# Altium PCB SPD Breakout.PcbDoc
Units mil, origin at the board's own origin, x right, y up, seen from the top; angles counter-clockwise.
Board outline 1560 x 2845 mil, 2 copper layers (Top Layer, Bottom Layer); 2 components, 12 nets, 220 pads, 7 vias.
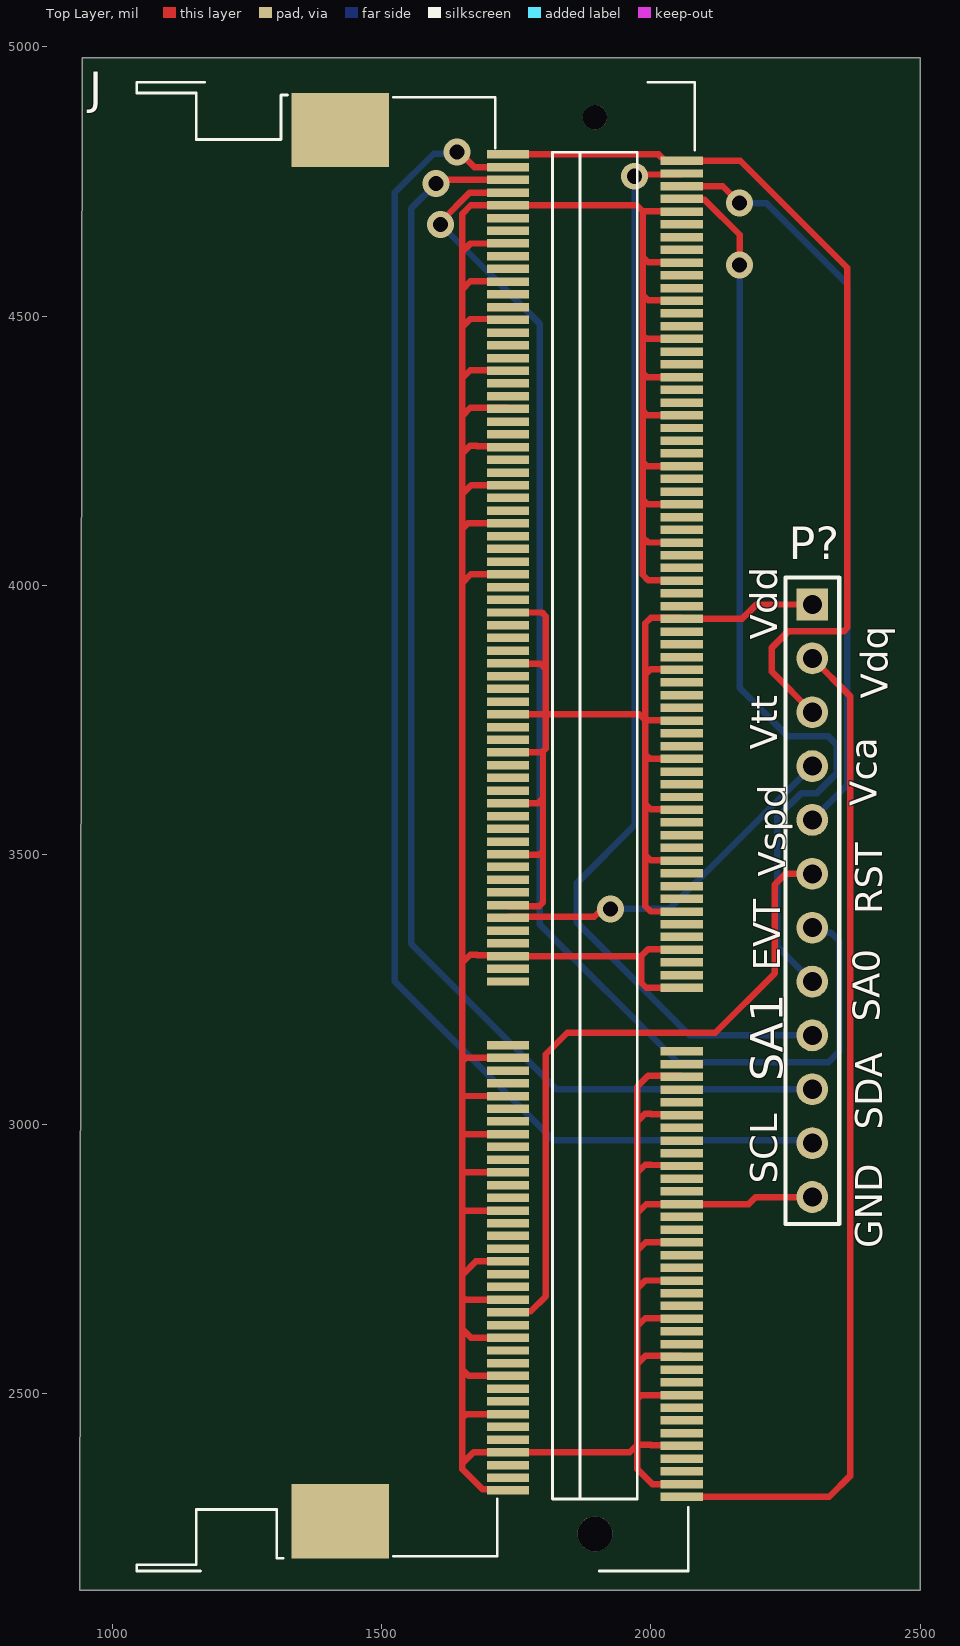
[diagram p0: Top Layer view]
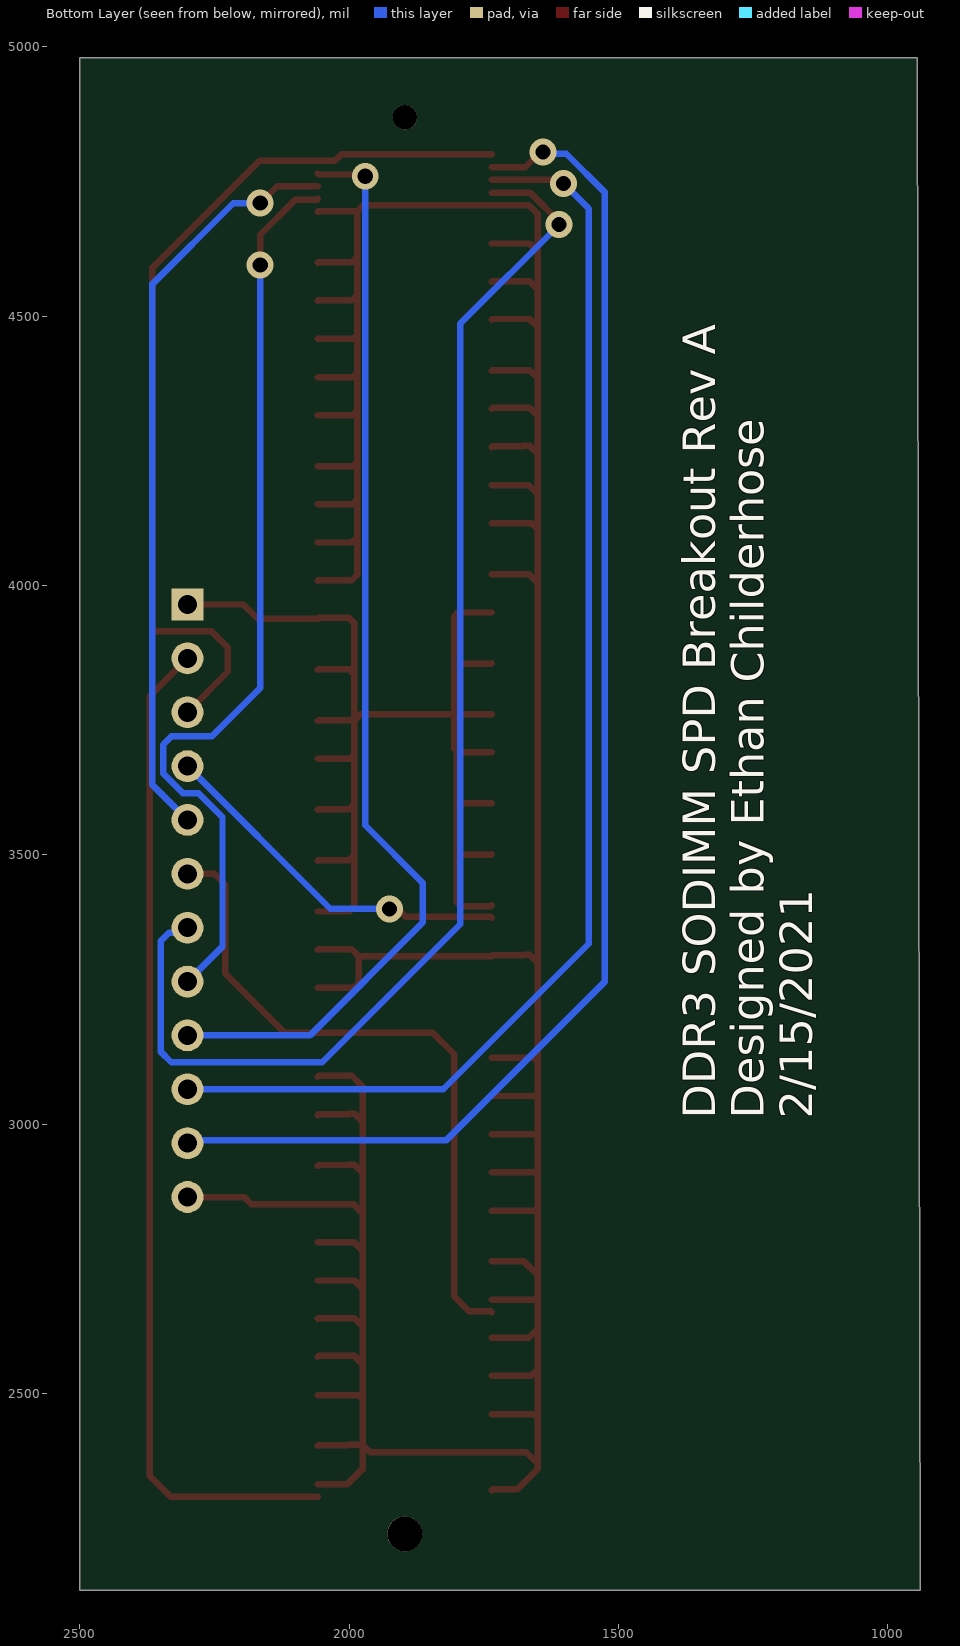
[diagram p1: Bottom Layer view, seen from below]

## Layer stack, top to bottom
Top Solder: solder mask 0.4, Solder Resist, Dk 3.5
Top Layer: signal copper 1.4
Dielectric 1: dielectric 12.6, FR-4, Dk 4.8
Bottom Layer: signal copper 1.4
Bottom Solder: solder mask 0.4, Solder Resist, Dk 3.5

## Board outline
945,4980 2500,4980 2500,2135 940,2135

## Design rules (kind name [scope] priority, off if disabled: settings)
Clearance [All] p1: gap=6 ignorepadtopadclearanceinfootprint=FALSE
PolygonConnect [All] p1: connectstyle=Relief reliefconductorwidth=10 reliefentries=4 polygonreliefangle="90 Angle" airgapwidth=10
RoutingVias [All] p1: holewidth=28 width=50 viastyle="Through Hole" minholewidth=28 minwidth=50 maxholewidth=28 maxwidth=50
SolderMaskExpansion [All] p1: expansion=4 istentingtop=FALSE
Width [All] p1: maxlimit=50 minlimit=6 preferedwidth=15
30 further rules are at their usual default settings.

## Components (designator, comment, footprint, x,y, rotation, side; value= is the part's Value field where it differs from the comment)
J "2013289-1" TE_2013289-1 1896.42,3552.52 r90 top
P? "Header 12" HDR1X12 2300,3965 r270 top

## Footprints (in the part's own frame and the unit in brackets; to place one, negate y for a bottom-side part, rotate by r counter-clockwise, add the part's x,y. Pads: shape width x height; smd on the part's side, far side on the other; paste and mask are expansions set on the pad)
HDR1X12 [mm] "Connector; Header; 12 Position"
  rect 1.5x1.5 hole 0.9: 1(0,0)
  round 1.5 hole 0.9: 2(2.54,0) 3(5.08,0) 4(7.62,0) 5(10.16,0) 6(12.7,0) 7(15.24,0) 8(17.78,0) 9(20.32,0) 10(22.86,0) 11(25.4,0) 12(27.94,0)
  silkscreen extent -1.27,-1.27 29.21,1.27
TE_2013289-1 [mm]
  rect 0.4x2 smd: 1(-31.6,-4.1) 2(-31.3,4.1) 3(-31,-4.1) 4(-30.7,4.1) 5(-30.4,-4.1) 6(-30.1,4.1) 7(-29.8,-4.1) 8(-29.5,4.1) 9(-29.2,-4.1) 10(-28.9,4.1) 11(-28.6,-4.1) 12(-28.3,4.1) 13(-28,-4.1) 14(-27.7,4.1) 15(-27.4,-4.1) 16(-27.1,4.1) 17(-26.8,-4.1) 18(-26.5,4.1) 19(-26.2,-4.1) 20(-25.9,4.1) 21(-25.6,-4.1) 22(-25.3,4.1) 23(-25,-4.1) 24(-24.7,4.1) 25(-24.4,-4.1) 26(-24.1,4.1) 27(-23.8,-4.1) 28(-23.5,4.1) 29(-23.2,-4.1) 30(-22.9,4.1) 31(-22.6,-4.1) 32(-22.3,4.1) 33(-22,-4.1) 34(-21.7,4.1) 35(-21.4,-4.1) 36(-21.1,4.1) 37(-20.8,-4.1) 38(-20.5,4.1) 39(-20.2,-4.1) 40(-19.9,4.1) 41(-19.6,-4.1) 42(-19.3,4.1) 43(-19,-4.1) 44(-18.7,4.1) 45(-18.4,-4.1) 46(-18.1,4.1) 47(-17.8,-4.1) 48(-17.5,4.1) 49(-17.2,-4.1) 50(-16.9,4.1) 51(-16.6,-4.1) 52(-16.3,4.1) 53(-16,-4.1) 54(-15.7,4.1) 55(-15.4,-4.1) 56(-15.1,4.1) 57(-14.8,-4.1) 58(-14.5,4.1) 59(-14.2,-4.1) 60(-13.9,4.1) 61(-13.6,-4.1) 62(-13.3,4.1) 63(-13,-4.1) 64(-12.7,4.1) 65(-12.4,-4.1) 66(-12.1,4.1) 67(-11.8,-4.1) 68(-11.5,4.1) 69(-11.2,-4.1) 70(-10.9,4.1) 71(-10.6,-4.1) 72(-10.3,4.1) 73(-7.6,-4.1) 74(-7.3,4.1) 75(-7,-4.1) 76(-6.7,4.1) 77(-6.4,-4.1) 78(-6.1,4.1) 79(-5.8,-4.1) 80(-5.5,4.1) 81(-5.2,-4.1) 82(-4.9,4.1) 83(-4.6,-4.1) 84(-4.3,4.1) 85(-4,-4.1) 86(-3.7,4.1) 87(-3.4,-4.1) 88(-3.1,4.1) 89(-2.8,-4.1) 90(-2.5,4.1) 91(-2.2,-4.1) 92(-1.9,4.1) 93(-1.6,-4.1) 94(-1.3,4.1) 95(-1,-4.1) 96(-0.7,4.1) 97(-0.4,-4.1) 98(-0.1,4.1) 99(0.2,-4.1) 100(0.5,4.1) 101(0.8,-4.1) 102(1.1,4.1) 103(1.4,-4.1) 104(1.7,4.1) 105(2,-4.1) 106(2.3,4.1) 107(2.6,-4.1) 108(2.9,4.1) 109(3.2,-4.1) 110(3.5,4.1) 111(3.8,-4.1) 112(4.1,4.1) 113(4.4,-4.1) 114(4.7,4.1) 115(5,-4.1) 116(5.3,4.1) 117(5.6,-4.1) 118(5.9,4.1) 119(6.2,-4.1) 120(6.5,4.1) 121(6.8,-4.1) 122(7.1,4.1) 123(7.4,-4.1) 124(7.7,4.1) 125(8,-4.1) 126(8.3,4.1) 127(8.6,-4.1) 128(8.9,4.1) 129(9.2,-4.1) 130(9.5,4.1) 131(9.8,-4.1) 132(10.1,4.1) 133(10.4,-4.1) 134(10.7,4.1) 135(11,-4.1) 136(11.3,4.1) 137(11.6,-4.1) 138(11.9,4.1) 139(12.2,-4.1) 140(12.5,4.1) 141(12.8,-4.1) 142(13.1,4.1) 143(13.4,-4.1) 144(13.7,4.1) 145(14,-4.1) 146(14.3,4.1) 147(14.6,-4.1) 148(14.9,4.1) 149(15.2,-4.1) 150(15.5,4.1) 151(15.8,-4.1) 152(16.1,4.1) 153(16.4,-4.1) 154(16.7,4.1) 155(17,-4.1) 156(17.3,4.1) 157(17.6,-4.1) 158(17.9,4.1) 159(18.2,-4.1) 160(18.5,4.1) 161(18.8,-4.1) 162(19.1,4.1) 163(19.4,-4.1) 164(19.7,4.1) 165(20,-4.1) 166(20.3,4.1) 167(20.6,-4.1) 168(20.9,4.1) 169(21.2,-4.1) 170(21.5,4.1) 171(21.8,-4.1) 172(22.1,4.1) 173(22.4,-4.1) 174(22.7,4.1) 175(23,-4.1) 176(23.3,4.1) 177(23.6,-4.1) 178(23.9,4.1) 179(24.2,-4.1) 180(24.5,4.1) 181(24.8,-4.1) 182(25.1,4.1) 183(25.4,-4.1) 184(25.7,4.1) 185(26,-4.1) 186(26.3,4.1) 187(26.6,-4.1) 188(26.9,4.1) 189(27.2,-4.1) 190(27.5,4.1) 191(27.8,-4.1) 192(28.1,4.1) 193(28.4,-4.1) 194(28.7,4.1) 195(29,-4.1) 196(29.3,4.1) 197(29.6,-4.1) 198(29.9,4.1) 199(30.2,-4.1) 200(30.5,4.1) 201(30.8,-4.1) 202(31.1,4.1) 203(31.4,-4.1) 204(31.7,4.1)
  rect 3.5x4.6 smd: P$1(-32.75,12) P$2(32.85,12)
  round 1.65 hole 1.65 unplated: ""(-33.35,0)
  round 1.15 hole 1.15 unplated: ""(33.45,0)
  silkscreen extent -35.1,-4.7 35.1,21.6, body extent -35.75,-5.02 35.85,21.52, height 5.52

## Part data
J: "204 Position 0.6 mm Pitch Right Angle Surface Mount Socket DIMM Connector", Package=None, Centerline_Pitch=".6 mm[.024 in]", Digi-Key_Part_Number=A115021-ND, Digi-Key_Purchase_URL=https://www.digikey.com/product-detail/en/te-connectivity-amp-connectors/2013289-1/A115021-ND/2135546?utm_source=snapeda&utm_medium=aggregator&utm_campaign=symbol, MF="TE Connectivity", MP=2013289-1, Number_of_Positions=204, Product_Type=Socket, SnapEDA_Link=https://www.snapeda.com/parts/2013289-1/TE%20Connectivity%20AMP%20Connectors/view-part/231016/?ref=snap, TE_purchase_URL=https://www.te.com/usa-en/product-2013289-1.html?te_bu=Cor&te_type=disp&te_campaign=seda_glo_cor-seda-global-disp-prtnr-fy19-seda-model-bom-cta_sma-317_1&elqCampaignId=32493
P?: "Header, 12-Pin", LatestRevisionDate=17-Jul-2002, LatestRevisionNote="Re-released for DXP Platform.", Publisher="Altium Limited"

## Via types
v1: diameter 50, hole 28, Top Layer to Bottom Layer, 7 vias

## Nets (pads, with @x,y where several pads share a name; then routed paths per layer and width w, separated by ;. In a path a pad name is that pad's centre, name@x,y a point inside that pad or via, vN(x,y) a via of type N, cw(c..) or ccw(c..) an arc to the next point about the centre after c; other vN are vias at no path point)
GND: J.2 J.3 J.8 J.9 J.14 J.17 J.20 J.23 J.26 J.29 J.32 J.35 J.38 J.41 J.46 J.47 J.52 J.53 J.58 J.61 J.64 J.67 J.70 J.73 J.78 J.79 J.137 J.138 J.143 J.146 J.149 J.152 J.155 J.158 J.163 J.164 J.169 J.170 J.175 J.178 J.181 J.184 J.187 J.190 J.195 J.196 P?.12 | length 8753
  Top Layer w12: 1677.61,4330 1665,4330 1649.97,4314.97 ; 1677.63,4329.98 1733.13,4329.98 J.164 ; J.2 1733.13,2322.11 1687.89,2322.11 1649.97,2360.03 1649.97,2369.97 ; J.14 1657,2461.97 1649.97,2454.94 ; J.20 1662.14,2532.83 1649.97,2545 ; J.26 1666.27,2603.7 1649.97,2620 ; J.32 1655.4,2674.57 1649.97,2680 ; J.38 1675.4,2745.43 1649.97,2720 ; J.46 1650.05,2839.92 1649.97,2840 ; J.52 1650.76,2910.79 1649.97,2910 ; J.58 1651.62,2981.65 1649.97,2980 ; J.64 1652.49,3052.52 1649.97,3050 ; J.70 1657,3123.39 1649.97,3116.36 ; J.138 1666.02,4021.02 1649.97,4004.97 ; J.146 1660.51,4115.51 1649.97,4104.97 ; J.152 1666.38,4186.38 1649.97,4169.97 ; J.158 1733.13,4259.12 1677.63,4259.12 1676.75,4260 1665,4260 1649.97,4244.97 ; J.170 1733.98,4400 1665,4400 1649.97,4384.97 ; J.178 1733.46,4495 1665,4495 1649.97,4479.97 ; J.184 1734.33,4565 1665,4565 1649.97,4549.97 ; J.190 1665.2,4635.2 1649.97,4619.97 ; J.3 2002.95,2332.05 1975,2360 1975,2405 ; J.9 2056.59,2404.16 2000.46,2404.16 1999.63,2405 1975,2405 ; J.17 1982.4,2497.4 1975,2490 ; J.23 2056.1,2570 1990,2570 1975,2555 ; J.29 2056.97,2640 1990,2640 1975,2625 ; J.35 1990,2710 1975,2695 ; J.41 1990.87,2780.87 1975,2765 ; J.53 2055.96,2924.47 2000.47,2924.47 1999.94,2925 1990,2925 1975,2910 ; J.61 2055.96,3018.96 2000.98,3018.96 1999.94,3020 1990,3020 1975,3005 ; J.67 2055.96,3089.83 2005.11,3089.83 2004.94,3090 1995,3090 1975,3070 1975,3005 ; J.73 1991.69,3253.31 1982.36,3262.64 1982.36,3312.36 ; J.79 2057.01,3325 1995,3325 1982.36,3312.36 ; J.137 2057.05,4010 1995,4010 1985,4020 1985,4090 ; J.143 1994.92,4080.08 1985,4090 ; J.149 1994.06,4150.94 1985,4160 ; J.155 1993.19,4221.81 1985,4230 ; J.163 1993.7,4316.3 1985,4325 ; J.169 1992.83,4387.17 1985,4395 ; J.175 1992.03,4458.03 1985,4465.06 ; J.181 2056.73,4530 1995,4530 1985,4540 ; J.187 2057.6,4600 1995,4600 1985,4610 ; J.195 2057.09,4695 1985,4695 ; P?.12 2194.93,2865 2181.66,2851.73 J.47 1991.73,2851.73 1975,2835 ; 1649.97,2369.97 1649.97,2454.94 ; 1649.97,2369.97 1671.1,2391.1 J.8 1961.1,2391.1 1975,2405 ; 1649.97,2454.94 1649.97,2545 ; 1649.97,2545 1649.97,2620 ; 1649.97,2620 1649.97,2680 ; 1649.97,2680 1649.97,2720 ; 1649.97,2720 1649.97,2840 ; 1649.97,2840 1649.97,2910 ; 1649.97,2910 1649.97,2980 ; 1649.97,2980 1649.97,3050 ; 1649.97,3050 1649.97,3116.36 ; 1649.97,3116.36 1649.97,3299.97 ; 1649.97,3299.97 1649.97,4004.97 ; 1649.97,3299.97 1665,3315 1676.87,3315 1677.63,3314.24 1733.13,3314.24 J.78 1982.36,3312.36 ; 1649.97,4004.97 1649.97,4104.97 ; 1649.97,4104.97 1649.97,4169.97 ; 1649.97,4169.97 1649.97,4244.97 ; 1649.97,4244.97 1649.97,4314.97 ; 1649.97,4314.97 1649.97,4384.97 ; 1649.97,4384.97 1649.97,4479.97 ; 1649.97,4479.97 1649.97,4549.97 ; 1649.97,4549.97 1649.97,4619.97 ; 1649.97,4619.97 1649.97,4689.97 1666.06,4706.06 J.196 1973.94,4706.06 1985,4695 ; 1975,2405 1975,2490 ; 1975,2490 1975,2555 ; 1975,2555 1975,2625 ; 1975,2625 1975,2695 ; 1975,2695 1975,2765 ; 1975,2765 1975,2835 ; 1975,2835 1975,2910 ; 1975,2910 1975,3005 ; 1985,4090 1985,4160 ; 1985,4160 1985,4230 ; 1985,4230 1985,4325 ; 1985,4325 1985,4395 ; 1985,4395 1985,4465.06 ; 1985,4465.06 1985,4540 ; 1985,4540 1985,4610 ; 1985,4610 1985,4695
NetJ_30: J.30 P?.6 | length 1262.2
  Top Layer w12: J.30 1736.87,2652.82 1777.47,2652.82 1805,2680.35 1805,3130 1845,3170 2120,3170 2230,3280 2230,3445 2250,3465 P?.6
NetJ_197: J.197 P?.8 | length 1728.9
  Top Layer w12: J.197 2059.71,4716 2100.3,4716 2165,4651.3 v1(2165,4595)
  Bottom Layer w12: v1(2165,4595) 2165,3810 2255,3720 2330,3720 2345,3705 2345,3651.27 2308.73,3615 2280,3615 2235,3570 2235,3330 P?.8
NetJ_198: J.198 P?.7 | length 2463.8
  Top Layer w12: v1(1610,4670.23) 1610,4675.46 1664.23,4729.69 J.198
  Bottom Layer w12: v1(1610,4670.23) 1793.64,4486.59 1793.64,3371.36 2050,3115 2330,3115 2350,3135 2350,3340 2334,3356 2309,3356 P?.7
NetJ_199: J.199 P?.5 | length 1404.3
  Top Layer w12: J.199 2133.5,4741.5 v1(2165,4710)
  Bottom Layer w12: v1(2165,4710) 2215,4710 2365,4560 2365,3630 P?.5
NetJ_200: J.200 P?.10 | length 2423.9
  Top Layer w12: v1(1601.65,4746.65) 1608.31,4753.31 J.200
  Bottom Layer w12: v1(1601.65,4746.65) 1555,4700 1555,3335 1825,3065 P?.10
NetJ_201: J.201 P?.9 | length 2043.5
  Top Layer w12: v1(1970,4760) 1973.24,4763.24 2055.96,4763.24 J.201
  Bottom Layer w12: v1(1970,4760) 1970,3555 1863,3448 1863,3374.67 2072.67,3165 P?.9
NetJ_202: J.202 P?.11 | length 2617
  Top Layer w12: v1(1640,4805) 1644.67,4805 1672.74,4776.93 J.202
  Bottom Layer w12: v1(1640,4805) 1637,4802 1597,4802 1525,4730 1525,3265 1820,2970 2295,2970 P?.11
Vdd: J.85 J.86 J.93 J.94 J.101 J.102 J.109 J.110 J.115 J.116 J.123 J.124 J.131 J.132 P?.1 | length 2491.2
  Top Layer w12: J.86 1736.85,3405 1792.97,3405 1800,3412.03 1800,3507.03 ; J.94 1736.34,3500 1792.97,3500 1800,3507.03 ; J.102 1790.83,3595.83 1800,3605 ; J.110 1797.97,3690.32 1800,3692.34 ; J.116 1805,3761.18 ; J.124 1735.67,3855 1795,3855 1805,3845 ; J.132 1797.97,3950.16 1805,3943.13 1805,3845 ; J.85 1999.96,3395.04 1990,3405 1990,3500 ; J.93 2057.36,3490 2000,3490 1990,3500 ; J.101 2056.85,3585 2000,3585 1990,3595 ; J.109 1998.53,3678.5 1990,3687.03 ; J.115 2057.2,3750 1990,3750 ; J.123 2056.69,3845 2000,3845 1990,3835 ; P?.1 2196.23,3965 2169.57,3938.35 J.131 2056.18,3940 2000,3940 1990,3930 1990,3835 ; 1800,3507.03 1800,3605 ; 1800,3605 1800,3692.34 ; 1800,3692.34 1805,3697.34 1805,3761.18 ; 1805,3761.18 1805,3845 ; 1805,3761.18 1978.82,3761.18 1990,3750 ; 1990,3500 1990,3595 ; 1990,3595 1990,3687.03 ; 1990,3687.03 1990,3750 ; 1990,3750 1990,3835
Vrefca: J.84 P?.4 | length 681.7
  Top Layer w12: J.84 1736.87,3385.1 1895.1,3385.1 1910,3400 v1(1925,3400)
  Bottom Layer w12: v1(1925,3400) 2035,3400 P?.4
Vrefdq: J.1 P?.2 | length 1875.1
  Top Layer w12: J.1 2331.4,2308.43 2370,2347.03 2370,3795 P?.2
Vtt: J.203 J.204 P?.3 | length 1691.6
  Top Layer w12: J.204 2014.53,4800.55 2026.34,4788.74 J.203 2166.26,4788.74 2365,4590 2365,3922.03 2357.97,3915 2255,3915 2225,3885 2225,3840 P?.3
pads on no net: J. J.4 J.5 J.6 J.7 J.10 J.11 J.12 J.13 J.15 J.16 J.18 J.19 J.21 J.22 J.24 J.25 J.27 J.28 J.31 J.33 J.34 J.36 J.37 J.39 J.40 J.42 J.43 J.44 J.45 J.48 J.49 J.50 J.51 J.54 J.55 J.56 J.57 J.59 J.60 J.62 J.63 J.65 J.66 J.68 J.69 J.71 J.72 J.74 J.75 J.76 J.77 J.80 J.81 J.82 J.83 J.87 J.88 J.89 J.90 J.91 J.92 J.95 J.96 J.97 J.98 J.99 J.100 J.103 J.104 J.105 J.106 J.107 J.108 J.111 J.112 J.113 J.114 J.117 J.118 J.119 J.120 J.121 J.122 J.125 J.126 J.127 J.128 J.129 J.130 J.133 J.134 J.135 J.136 J.139 J.140 J.141 J.142 J.144 J.145 J.147 J.148 J.150 J.151 J.153 J.154 J.156 J.157 J.159 J.160 J.161 J.162 J.165 J.166 J.167 J.168 J.171 J.172 J.173 J.174 J.176 J.177 J.179 J.180 J.182 J.183 J.185 J.186 J.188 J.189 J.191 J.192 J.193 J.194 J.P$1 J.P$2

## Silkscreen, mask and mechanical layers (free items; w line width, h text height)
Top Overlay:
  text "Vdd" at 2235,3900 h50 r90
  text "Vdq" at 2440,3790 h50 r90
  text "Vtt" at 2235,3695 h50 r90
  text "Vca" at 2420,3590 h50 r90
  text "Vspd" at 2250,3460 h50 r90
  text "RST" at 2430,3390 h50 r90
  text "EVT" at 2240,3285 h50 r90
  text "SA0" at 2425,3190 h50 r90
  text "SA1" at 2245,3080 h60 r90
  text "SDA" at 2430,2990 h50 r90
  text "SCL" at 2235,2890 h50 r90
  text "GND" at 2430,2770 h50 r90
Bottom Overlay:
  text "DDR3 SODIMM SPD Breakout Rev A / Designed by Ethan Childerhose / 2/15/2021" at 1140,3010 h60 r270